# Altium PCB PCB_arranged.PcbDoc
Units mm, origin at the board's own origin, x right, y up, seen from the top; angles counter-clockwise.
Board outline 68.07 x 82.93 mm, 2 copper layers (Top Layer, Bottom Layer); 43 components, 27 nets, 114 pads, 16 vias.
Unrouted connection lines stored in the file: 2.
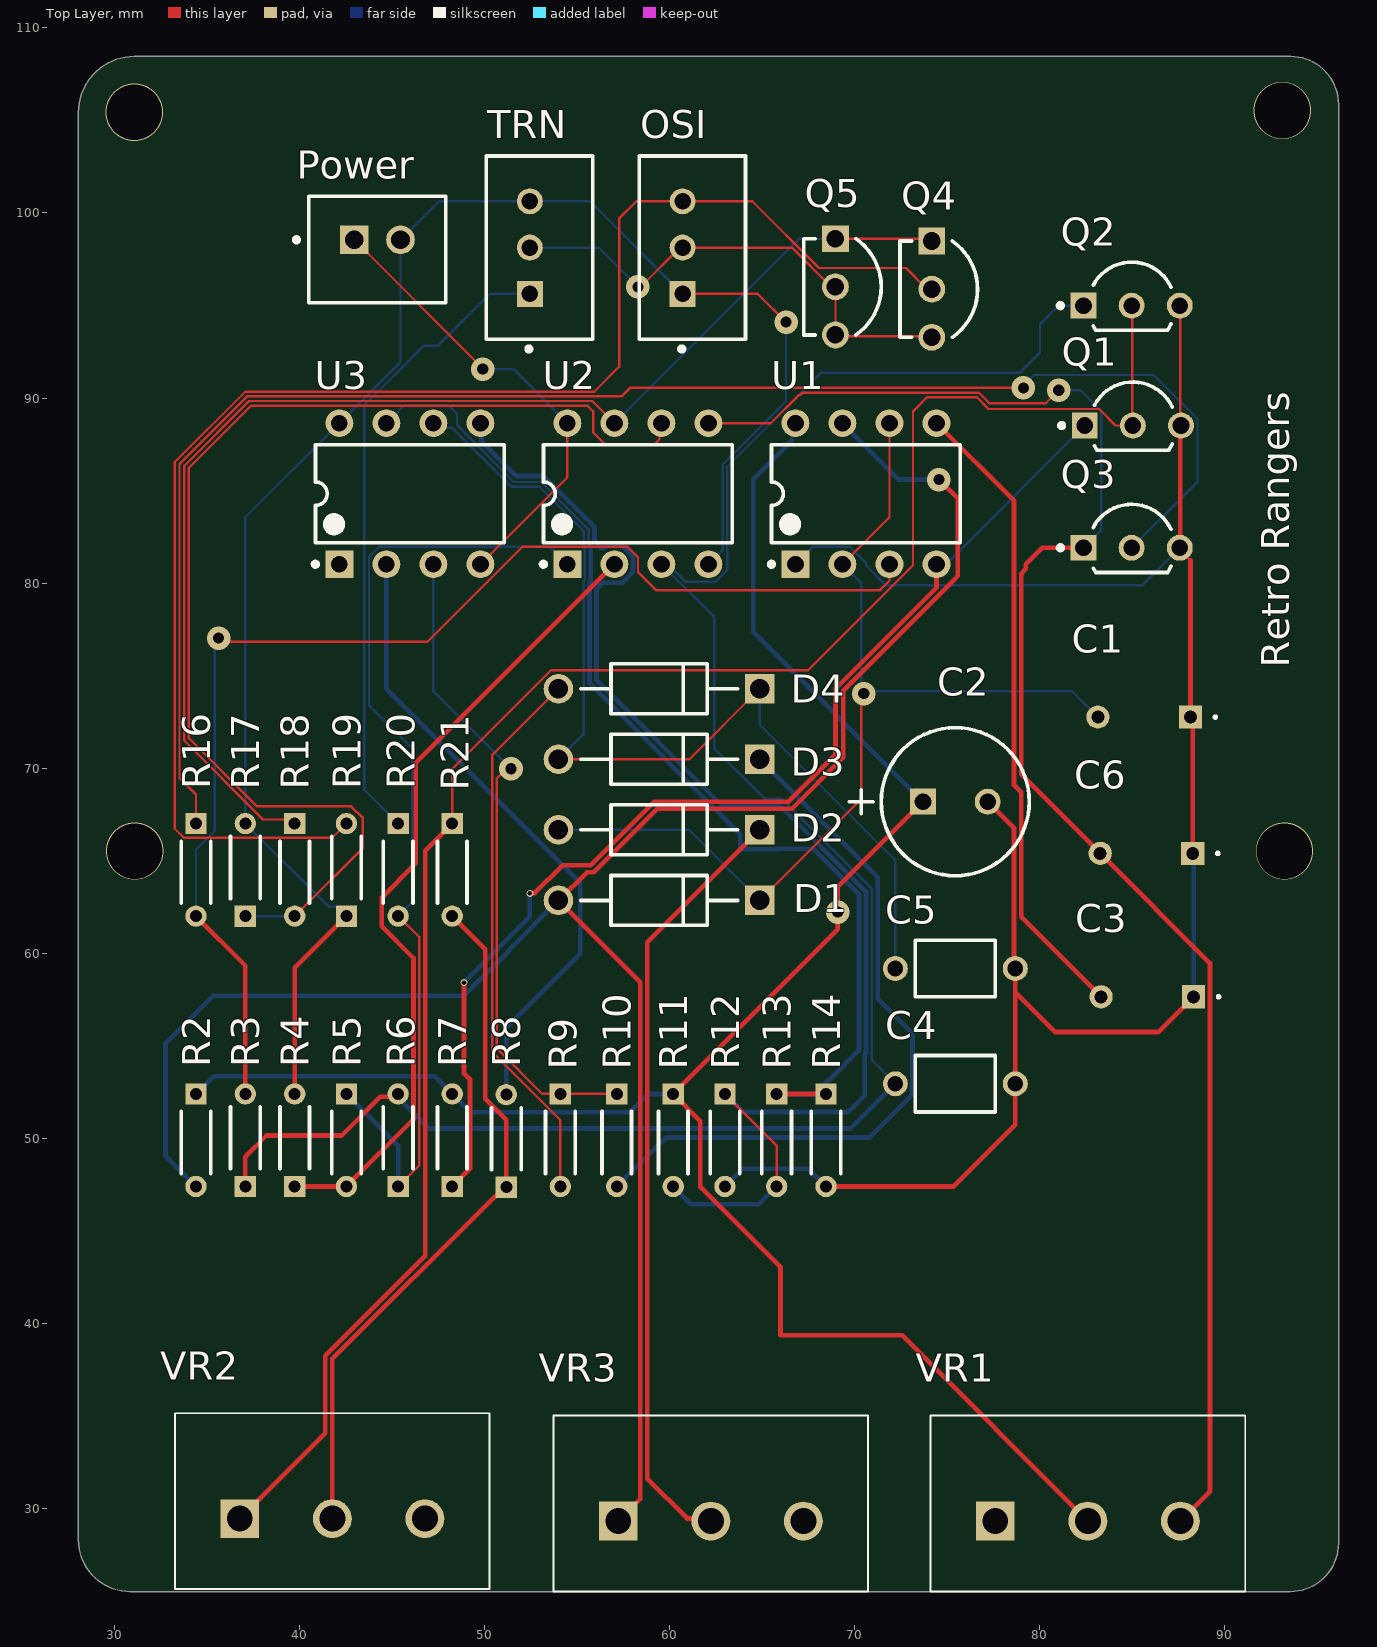
[diagram p0: Top Layer view]
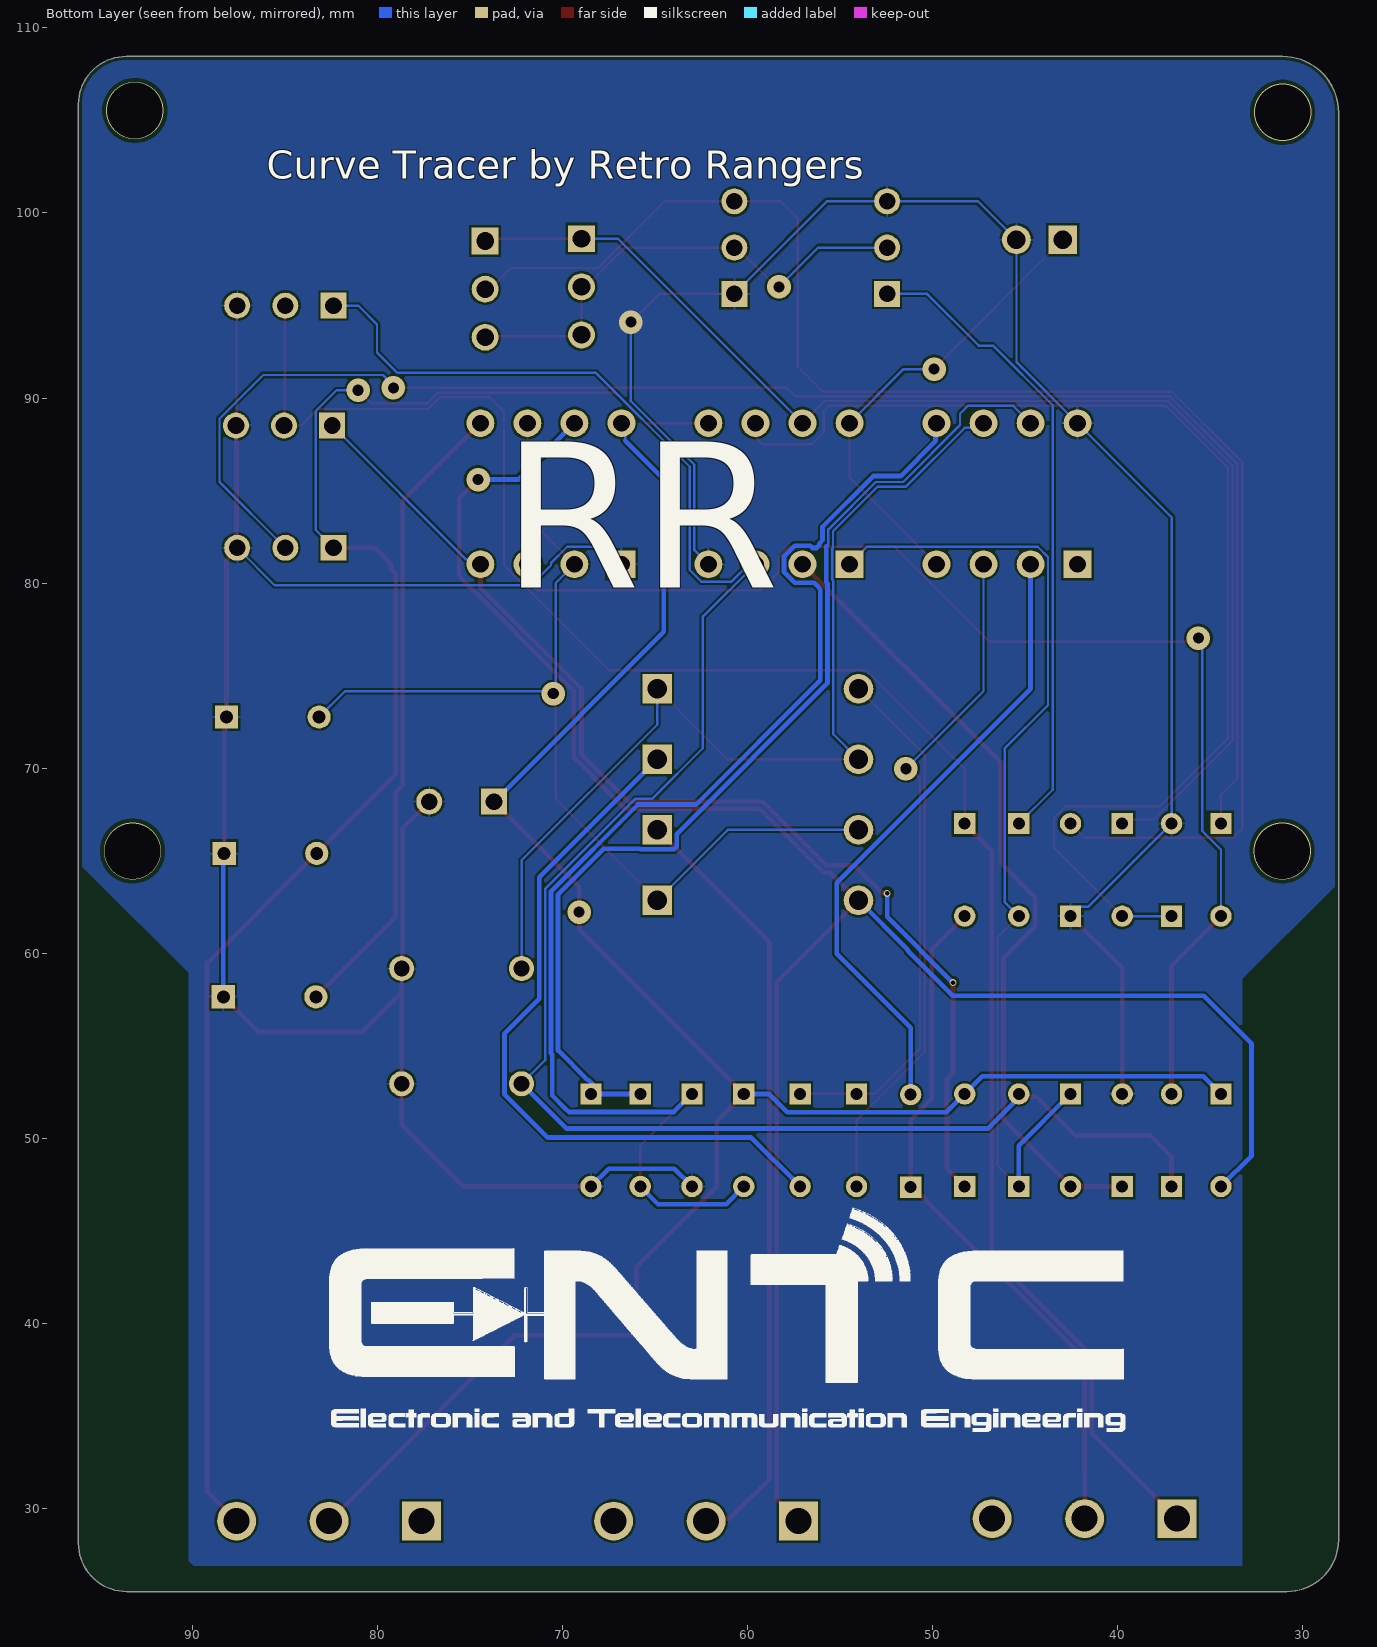
[diagram p1: Bottom Layer view, seen from below]

## Layer stack, top to bottom
Top Solder: solder mask 0.0102, Solder Resist, Dk 3.5
Top Layer: signal copper 0.0356
Dielectric 1: dielectric 0.32, FR-4, Dk 4.8
Bottom Layer: signal copper 0.0356
Bottom Solder: solder mask 0.0102, Solder Resist, Dk 3.5

## Board outline
28.067,28.314 ccw(c30.854,28.314) 30.854,25.527 93.537,25.527 ccw(c93.537,28.129) 96.139,28.129 96.139,71.12 96.139,105.871 ccw(c93.552,105.871) 93.552,108.458 31.089,108.458 ccw(c31.089,105.436) 28.067,105.436

## Design rules (kind name [scope] priority, off if disabled: settings)
BoardOutlineClearance [All] p1: gap=0.2 ignorepadtopadclearanceinfootprint=FALSE
Clearance [All] p1: gap=0.127 ignorepadtopadclearanceinfootprint=FALSE except(0.25: Arc-Hole Track-Hole SMDPad-Hole THPad-Hole Via-Hole Fill-Hole Poly-Hole Region-Hole Text-Hole)
ComponentClearance [All] p1: gap=0.127 collisioncheckmode=3 verticalgap=0.127 showdistances=TRUE
DiffPairsRouting [All] p1: maxlimit=0.254 minlimit=0.127 mostfreqgap=0.127 toplayer_minwidth=0.127 toplayer_maxwidth=25.4 toplayer_prefwidth=0.127 bottomlayer_minwidth=0.127 bottomlayer_maxwidth=25.4 bottomlayer_prefwidth=0.127 maxuncoupledlength=12.7
Height [All] p1: minheight=0 maxheight=1816.048 prefheight=12.7
HoleSize [All] p1: absolutevalues=TRUE maxlimit=6.3 minlimit=0.3 maxpercent=80.000 minpercent=20.000
HoleToHoleClearance [All] p1: gap=0.25 allowstackedmicrovias=FALSE
MinimumAnnularRing [All] p1: minimumring=0.076
MinimumSolderMaskSliver [All] p1: minsoldermaskwidth=0
PlaneClearance [All] p1: clearance=0.127
PlaneConnect PlaneConnectPowerPads [InPadClass('PowerPads')] p1: planeconnectstyle=Direct reliefexpansion=0.508 reliefentries=4 reliefconductorwidth=0.254 reliefairgap=0.254
PlaneConnect [All] p2: pad.planeconnectstyle=Relief pad.reliefexpansion=0.3 pad.reliefentries=4 pad.reliefconductorwidth=0.127 pad.reliefairgap=0.127 via.planeconnectstyle=Direct via.reliefexpansion=0.3 via.reliefentries=4 via.reliefconductorwidth=0.127 via.reliefairgap=0.127
PolygonConnect PolygonConnectPowerPads [All vs (InPadClass('PowerPads'))] p1: connectstyle=Direct reliefconductorwidth=0.254 reliefentries=4 polygonreliefangle="90 Angle" airgapwidth=0.254
PolygonConnect [All] p2: thpad.connectstyle=Relief thpad.reliefconductorwidth=0.127 thpad.reliefentries=4 thpad.polygonreliefangle="90 Angle" thpad.airgapwidth=0.127 smdpad.connectstyle=Relief smdpad.reliefconductorwidth=0.127 smdpad.reliefentries=4 smdpad.polygonreliefangle="90 Angle" smdpad.airgapwidth=0.127 via.connectstyle=Direct via.reliefconductorwidth=0.127 via.reliefentries=4 via.polygonreliefangle="90 Angle" via.airgapwidth=0.127
RoutingVias [All] p1: holewidth=0.3 width=0.6 viastyle="Through Hole" minholewidth=0.3 minwidth=0.6 maxholewidth=0.6 maxwidth=6.6
SilkToSilkClearance [All] p1: silktosilkclearance=0
SilkToSolderMaskClearance [IsPad] p1: minsilkscreentomaskgap=0.127 clearancetoexposedcopper=TRUE
SolderMaskExpansion [All] p1: expansion=0.075 istentingtop=FALSE
Width [All] p1: maxlimit=25.4 minlimit=0.127 preferedwidth=0.127 minimp=50.000000 maximp=50.000000 favimp=50.000000
20 further rules are at their usual default settings.

## Components (designator, comment, footprint, x,y, rotation, side; value= is the part's Value field where it differs from the comment)
C1 "FG24X7R1A106KRT00" FG24 88.138,72.771 r180 top
C2 "ECA-2AM470" CAPPR65-350-1150X800X1250 75.438,68.199 r0 top
C3 "FG24X7R1A106KRT00" FG24 88.312,57.658 r180 top
C4 "SA115C104KAR" AVX-SA115C104KAR 75.438,52.959 r0 top
C5 "SA115C104KAR" AVX-SA115C104KAR 75.438,59.182 r180 top
C6 "FG24X7R1A106KRT00" FG24 88.265,65.405 r180 top
D1 "1N4001-E3/54" FP-1N4001-E3-54-MFG 59.436,62.865 r180 top
D2 "1N4001-E3/54" FP-1N4001-E3-54-MFG 59.436,66.675 r180 top
D3 "1N4001-E3/54" FP-1N4001-E3-54-MFG 59.436,70.485 r180 top
D4 "1N4001-E3/54" FP-1N4001-E3-54-MFG 59.436,74.295 r180 top
OSI "to osilascope" FP-B3B-XH-A_LF_SN-MFG 61.231,98.131 r90 top
Power "B2B-XH-A(LF)(SN)" FP-B2B-XH-A_LF_SN-MFG 44.216,98.027 r0 top
Q1 "P2N2222ARL1G" ONSC-TO-92-3-29-11_AM_BL 85.03,88.519 r0 top
Q2 "P2N2222ARL1G" ONSC-TO-92-3-29-11_AM_BL 84.963,94.996 r0 top
Q3 "P2N2222ARL1G" ONSC-TO-92-3-29-11_AM_BL 84.963,81.915 r0 top
Q4 "2N3906TF" FP-135AR-MFG 74.549,95.885 r0 top
Q5 "2N3906TF" FP-135AR-MFG 69.342,96.012 r0 top
R2 "MRS16000C2002FCT00" FP-MRS1600-MFG 34.417,49.911 r270 top
R3 "MRS16000C2002FCT00" FP-MRS1600-MFG 37.084,49.911 r90 top
R4 "MRS16000C2002FCT00" FP-MRS1600-MFG 39.751,49.911 r90 top
R5 "MRS16000C2002FCT00" FP-MRS1600-MFG 42.545,49.911 r270 top
R6 "MRS16000C2002FCT00" FP-MRS1600-MFG 45.339,49.911 r90 top
R7 "MRS16000C2002FCT00" FP-MRS1600-MFG 48.26,49.911 r90 top
R8 "MRS16000C2002FCT00" FP-MRS1600-MFG 51.181,49.871 r90 top
R9 "MRS16000C2002FCT00" FP-MRS1600-MFG 54.102,49.911 r270 top
R10 "MRS16000C2002FCT00" FP-MRS1600-MFG 57.15,49.911 r270 top
R11 "MRS16000C2002FCT00" FP-MRS1600-MFG 60.198,49.911 r270 top
R12 "MRS16000C2002FCT00" FP-MRS1600-MFG 62.992,49.911 r270 top
R13 "MRS16000C2002FCT00" FP-MRS1600-MFG 65.786,49.911 r270 top
R14 "MRS16000C2002FCT00" FP-MRS1600-MFG 68.453,49.911 r270 top
R16 "MRS16000C2002FCT00" FP-MRS1600-MFG 34.417,64.516 r270 top
R17 "MRS16000C2002FCT00" FP-MRS1600-MFG 37.084,64.516 r90 top
R18 "MRS16000C2002FCT00" FP-MRS1600-MFG 39.751,64.516 r270 top
R19 "MRS16000C2002FCT00" FP-MRS1600-MFG 42.545,64.516 r90 top
R20 "MRS16000C2002FCT00" FP-MRS1600-MFG 45.339,64.516 r270 top
R21 "MRS16000C2002FCT00" FP-MRS1600-MFG 48.26,64.516 r270 top
TRN "B3B-XH-A(LF)(SN)" FP-B3B-XH-A_LF_SN-MFG 52.976,98.131 r90 top
U1 "NE555P" P0008A 70.612,84.836 r90 top
U2 "NE5532N" ONSC-PDIP-8-626-05 58.293,84.836 r90 top
U3 "TL072CP" P0008A 45.974,84.836 r90 top
VR1 "P160KN-0QC15B10K" P160KN0QC15B10K 77.597,29.337 r270 top
VR2 "P160KN-0QC15B10K" P160KN0QC15B10K 36.783,29.464 r270 top
VR3 "P160KN-0QC15B10K" P160KN0QC15B10K 57.23,29.337 r270 top

## Footprints (in the part's own frame and the unit in brackets; to place one, negate y for a bottom-side part, rotate by r counter-clockwise, add the part's x,y. Pads: shape width x height; smd on the part's side, far side on the other; paste and mask are expansions set on the pad)
AVX-SA115C104KAR [mm] "THD, 2-Leads, Dia 3.05mm, Body Length 4.32mm"
  round 1.35 hole 0.85: 1(-3.24,0) 2(3.24,0)
  silkscreen extent -2.16,-1.53 2.16,1.53, body extent -3.53,-1.52 3.53,1.52, height 3.05
CAPPR65-350-1150X800X1250 [mm] "THD, 2-Leads, Dia 8mm, Body 11.5mm"
  rect 1.4x1.4 hole 0.9: 1(-1.75,0)
  round 1.4 hole 0.9: 2(1.75,0)
  silkscreen extent -5.71,-4 4,4, body extent -4,-4 4,4, height 12.5
FG24 [mm]
  rect 1.25x1.25 hole 0.7: 1(0,0)
  round 1.25 hole 0.7: 2(5,0)
  silkscreen extent -1.4,-0.05 -1.3,0.05, body extent -0.28,-1.5 5.22,1.5, height 6.04
FP-1N4001-E3-54-MFG [mm]
  rect 1.6x1.6 hole 1.05 paste-1000 mask+0: 1(-5.438,0)
  round 1.6 hole 1.05 paste-1000 mask+0: 2(5.438,0)
  silkscreen extent -4.24,-1.35 4.24,1.35, body extent -6.34,-1.45 6.34,1.45, height 0.25
FP-135AR-MFG [mm]
  rect 1.45x1.45 hole 0.95 paste-1000 mask+0: 1(-0.38,2.6)
  round 1.45 hole 0.95 paste-1000 mask+0: 2(-0.38,0) 3(-0.38,-2.6)
  silkscreen extent -2.09,-2.6 2.09,2.6, body extent -2.19,-3.42 2.19,3.42, height 0.25
FP-B2B-XH-A_LF_SN-MFG [mm]
  rect 1.55x1.55 hole 1 paste-1000 mask+0: 1(-1.25,0.525)
  round 1.55 hole 1 paste-1000 mask+0: 2(1.25,0.525)
  silkscreen extent -4.5,-2.88 3.7,2.88, body extent -3.8,-2.98 3.8,2.98, height 0.25
FP-B3B-XH-A_LF_SN-MFG [mm]
  rect 1.4x1.4 hole 0.9 paste-1000 mask+0: 1(-2.5,0.525)
  round 1.4 hole 0.9 paste-1000 mask+0: 2(0,0.525) 3(2.5,0.525)
  silkscreen extent -5.6,-2.88 4.95,2.88, body extent -5.05,-2.98 5.05,2.98, height 0.25
FP-MRS1600-MFG [mm]
  rect 1.15x1.15 hole 0.65 paste-1000 mask+0: 1(-2.5,0)
  round 1.15 hole 0.65 paste-1000 mask+0: 2(2.5,0)
  silkscreen extent -1.55,-0.8 1.8,0.8, body extent -3.17,-0.9 3.17,0.9, height 0.25
ONSC-PDIP-8-626-05 [mm] "DIP, 8-Leads, Body 10.15x7.1mm, Pitch 2.54mm"
  rect 1.5x1.5 hole 0.9: 1(-3.81,3.81)
  round 1.5 hole 0.9: 2(-3.81,1.27) 3(-3.81,-1.27) 4(-3.81,-3.81) 5(3.81,-3.81) 6(3.81,-1.27) 7(3.81,1.27) 8(3.81,3.81)
  silkscreen extent -3.93,-5.1 2.65,5.23, body extent -3.95,-5.07 3.95,5.07, height 5.33
ONSC-TO-92-3-29-11_AM_BL [mm] "TO, 3-Leads, Body Dia 4.7mm, Pitch 2.6mm"
  rect 1.4x1.4 hole 0.9: 1(-2.6,0)
  round 1.4 hole 0.9: 2(0,0) 3(2.6,0)
  silkscreen extent -3.97,-1.34 2.13,2.35, body extent -2.84,-1.34 2.84,2.35, height 5.33
P0008A [mm] "DIP, 8-Leads, Body 10.15x6.6mm, Pitch 2.54mm"
  rect 1.5x1.5 hole 0.9: 1(-3.81,3.81)
  round 1.5 hole 0.9: 2(-3.81,1.27) 3(-3.81,-1.27) 4(-3.81,-3.81) 5(3.81,-3.81) 6(3.81,-1.27) 7(3.81,1.27) 8(3.81,3.81)
  silkscreen extent -3.93,-5.1 2.65,5.23, body extent -3.95,-5.07 3.95,5.07, height 5.08
P160KN0QC15B10K [mm]
  rect 2.1x2.1 hole 1.4: 1(0,0)
  round 2.1 hole 1.4: 2(0,5) 3(0,10)
  silkscreen extent -5.7,-3.5 3.8,13.5, body extent -5.7,-3.5 18.8,13.5, height 16.6

## Part data
C1 C3 C6: "Capacitor", Manufacturer_Name=TDK, Mouser Part Number=810-FG24X7R1A106KRT0, Arrow Part Number=FG24X7R1A106KRT00, Arrow Price/Stock=https://www.arrow.com/en/products/fg24x7r1a106krt00/tdk?region=nac, Datasheet Link=https://product.tdk.com/system/files/dam/doc/product/capacitor/ceramic/lead-mlcc/catalog/leadmlcc_halogenfree_fg_en.pdf, Height=5.5mm, Manufacturer_Part_Number=FG24X7R1A106KRT00, Mouser Price/Stock=https://www.mouser.co.uk/ProductDetail/TDK/FG24X7R1A106KRT00?qs=vNwBHymccZ8cUZDCmwcuOA%3D%3D
C2: library part CMP-1665-00041-1, "Aluminum Electrolytic Capacitor, 47 uF, +/- 20%, 100 V, -40 to 85 degC, 2-Pin THD, RoHS, Bulk", Case\Package=QFN, Max Operating Temperature="70 degC", Min Operating Temperature="-20 degC", Nominal Supply Voltage="3.3 V", Package Quantity=500, ComponentLink1Description="Manufacturer URL", ComponentLink1URL=http://www.panasonic.com/, ComponentLink2Description=Datasheet, ComponentLink2URL=http://industrial.panasonic.com/cdbs/www-data/pdf/RDF0000/ABA0000C1047.pdf, Data Rate="54 mbps", DatasheetVersion=Mar-16, Length="7.7 mm", Mount="Surface Mount", PackageDescription="2-Pin Radial Lead, Dia 8 mm, Body Length 11.5 mm", PackageReference=CAPPR65-350-1150X800X1250, Packaging="Tape and Reel", Pins=48, Radiation Hardening=No, RoHSCompliant=true
C4 C5: library part CMP-2000-07029-1, "Axial Leads / SpinGuard(R), Ceramic Capacitor, 0.10 uF +/- 10%, 50V, -55 to 125 degC, 2-Pin THD, RoHS, Tape and Reel", Capacitance=0.1µF, Manufacturer=AVX, Operating Temperature=-55°C~125°C, Package / Case=Axial, Package Description="2-Pin Axial Lead, Dia 3.05 mm, Body Length 4.32 mm", Ratings=-, Standard Package=1, Temperature Coefficient=X7R, Tolerance=±10%, Voltage - Rated=50V, Applications=GeneralPurpose, Catalog Drawings=SASeries_4.32x3.05, Category=Capacitors, Datasheet URL=https://datasheet.ciiva.com/27051/1074183-27051369.pdf, Datasheet Version=06/2007, Family=CeramicCapacitors, Features=-, Height - Seated (Max)=-, Lead Spacing=-, Lead Style=-, Manufacturer URL=http://www.avx.com/, Mounting Technology=ThroughHole, Mounting Type=ThroughHole, Online Catalog=SpinGuard®SASeries, Other Names=478-3151-1, Package Reference=SA115C104KAR, Packaging=-, Product Training Modules=ComponentSolutionsforSmartMeterApplications, Series=SpinGuard®SA, Size / Dimension="0.120\"Diax0.170\"L(3.05mmx4.32mm)", Thickness (Max)=-
D1 D2 D3 D4: library part CMP-02540-000077-1, "DIODE GEN PURP 50V 1A DO204AL", Average Rectified Current=1A, Capacitance=15pF, Case/Package=DO-204AL, Forward Voltage=1.1V, Max Forward Surge Current (Ifsm)=30A, Max Operating Temperature=150°C, Max Repetitive Reverse Voltage (Vrrm)=50V, Max Reverse Current=5uA, Min Operating Temperature=-50°C, Package Quantity=5500, Peak Non-Repetitive Surge Current=45A, Current=1A, Current Rating=1A, Diameter=2.7mm, Element Configuration=Single, Forward Current=1A, Height=2.7mm, Lead Free="Lead Free", Length=0.204inch, Max Reverse Voltage (DC)=50V, Max Surge Current=30A, Mount="Through Hole", Number of Pins=2, Output Current=1A, Packaging="Tape and Reel", Polarity=Standard, Radiation Hardening=No, Reverse Voltage=50V, RoHS Compliant=Yes, Series=-, Voltage=50V, Voltage Rating (DC)=50V, Width=2.7mm
OSI TRN: library part CMP-17439-000014-3, "CONN HEADER VERT 3POS 2.5MM", Color=Natural, Contact Resistance=20mR, Current Rating=3A, Flammability Rating="UL94 V-0", Housing Color=White, Insulation Resistance=1GR, Max Operating Temperature=85°C, Max Voltage Rating (AC)=250V, Min Operating Temperature=-25°C, Connector Type=Header, Contact Finish - Mating=TIN, Contact Material=Brass, Contact Plating=Tin, Contact Shape=Square, Contact Type="Male Pin", Depth=5.75mm, Fastening Type=Detent, Gender=Male, Housing Material=Polyamide, Insulation Color=Natural, Insulation Material=Nylon, Lead Free="Lead Free", Lead Pitch=2.5mm, Length=9.9mm, Max Current Rating=3A, Max Voltage Rating (DC)=250V, Mount="Through Hole", Number Of Contacts=3, Number of Positions=3, Number Of Rows=1, Orientation=Straight, Packaging=Bulk, Pitch=2.5mm, REACH SVHC="No SVHC", Series=XH, Termination=Solder, Voltage Rating=250V, Voltage Rating (AC)=250V, Wire/Cable Gauge=22AWG
Power: library part CMP-2000-05888-3, "CONN HEADER VERT 2POS 2.5MM", Color=Natural, Contact Resistance=20mR, Current Rating=3A, Housing Color=White, Insulation Resistance=1GR, Max Operating Temperature=85°C, Max Voltage Rating (AC)=250V, Min Operating Temperature=-25°C, Connector Type="Male Pin", Contact Material=Brass, Contact Plating=Tin, Contact Type="Male Pin", Depth=5.75mm, Fastening Type=Detent, Housing Material=Polyamide, Lead Free="Lead Free", Lead Pitch=2.5mm, Length=7.4mm, Max Current Rating=3A, Max Voltage Rating (DC)=250V, Mount="Through Hole", Number Of Contacts=2, Number of Positions=2, Number Of Rows=1, Orientation=Straight, Packaging=Bulk, Pitch=2.5mm, REACH SVHC="No SVHC", Series=XH, Termination=Solder, Voltage Rating=250V, Voltage Rating (AC)=250V, Wire/Cable Gauge=22AWG
Q1 Q2 Q3: library part CMP-1048-01587-1, "Amplifier Transistor, NPN Silicon, 3-Pin TO-92, Pb-Free, Tape and Reel", Manufacturer="On Semiconductor", ComponentLink1Description="Manufacturer URL", ComponentLink1URL=http://www.onsemi.com/, ComponentLink2Description=Datasheet, ComponentLink2URL=http://www.onsemi.com/pub_link/Collateral/P2N2222A-D.PDF, ComponentLink3Description="Package Specification", ComponentLink3URL=http://www.onsemi.com/pub_link/Collateral/MAC97-D.PDF, DatasheetVersion="Rev. 7", fT Min (MHz)=300, IC Continuous (A)=0.6, Mounting Technology="Through Hole", PackageDescription="3-Pin Transistor Outline, Body 4.825 x 3.685 mm, Pitch 1.27 mm", PackageReference=TO-92-3-29-11_AM_BL, PackageVersion="Rev. AM", Packing="Tape and Reel", PartNumber=P2N2222ARL1G, Polarity=NPN, RoHS=TRUE
Q4 Q5: library part CMP-00278-84408866-1, "2N3906TF Small Signal Bipolar Transistor, 0.2A I(C), 40V V(BR)CEO, 1-Element, PNP, Silicon, TO-92", Case/Package=TO-92, Collector Base Voltage (VCBO)=-40V, Collector Emitter Saturation Voltage=-400mV, Current Rating=-200mA, Emitter Base Voltage (VEBO)=-5V, Frequency=250MHz, Manufacturer Lifecycle Status=ACTIVE, Max Breakdown Voltage=160V, Max Junction Temperature (Tj)=150°C, Max Power Dissipation=625mW, Min Operating Temperature=-55°C, Collector Emitter Breakdown Voltage=-40V, Collector Emitter Voltage (VCEO)=-40V, Element Configuration=Single, Gain Bandwidth Product=250MHz, Height=5.33mm, hFE Min=100, Lead Free="Lead Free", Length=5.2mm, Lifecycle Status=Production, Max Collector Current=-200mA, Max Frequency=250MHz, Max Operating Temperature=150°C, Mount="Through Hole", NexarPartId=84408866, Number of Elements=1, Number of Pins=3, Packaging="Tape and Reel", Polarity=PNP, Power Dissipation=625mW, Radiation Hardening=No, REACH SVHC="No SVHC", RoHS=Compliant, Schedule B=8541210080, Transition Frequency=250MHz, Voltage Rating (DC)=-40V, Weight=240mg, Width=4.19mm
R2 R3 R4 R5 R6 R7 R8 R9 R10 R11 R12 R13 R14 R16 R17 R18 R19 R20 R21: library part CMP-02408-000019-1, "RES 20K OHM 0.4W 1% AXIAL", Case/Package=Conformal, Max Operating Temperature=155°C, Max Power Dissipation=400mW, Min Operating Temperature=-55°C, Resistance=20kR, Resistor Type="Metal Film", Temperature Coefficient=50ppm/°C, Tolerance=1%, Construction=Cylindrical, Contact Plating=Tin, Diameter=1.6mm, Length=3.6mm, Military Standard=Not, Mount="Through Hole", Number of Terminations=2, Packaging="Tape and Reel", Power Rating=400mW, Radiation Hardening=No, RoHS Compliant=Yes, Series=MRS16, Technology="THIN FILM", Termination=Axial
U1: library part CMP-2000-04954-1, "Precision Timer, 4.5 to 16 V, 0 to 70 degC, 8-Pin DIP, Pb-Free, Tube", Manufacturer=TexasInstruments, Maximum High Level Output Current=-200mA, Maximum Low Level Output Current=200mA, Operating Supply Voltage=5, Package=8PDIP, Package Description="8-Pin Double In-line Package, Body 9.59 x 6.35 mm, Pitch 2.54 mm", Package Reference=P8, Category=Timer, Datasheet URL=http://www.ti.com/general/docs/lit/getliterature.tsp?genericPartNumber=NE555&fileType=pdf, Datasheet Version="Rev. I, 09/2014", Manufacturer URL=http://www.ti.com/, Number of Internal Timers=1, Package URL=http://www.ti.com/lit/ml/mpdi001b/mpdi001b.pdf, Packaging=Rail/Tube, Rad Hard=No, Type=Standard
U2: library part CMP-1310-00070-1, "Internally Compensated Dual Low Noise Operational Amplifier, 6 to 40 V, 0 to 70 degC, 8-Pin PDIP, Tube", Manufacturer="On Semiconductor", ComponentLink1Description="Manufacturer URL", ComponentLink1URL=http://www.onsemi.com/, ComponentLink2Description=Datasheet, ComponentLink2URL=http://www.onsemi.cn/pub_link/Collateral/NE5532-D.PDF, ComponentLink3Description="Package Specification", ComponentLink3URL=http://www.onsemi.cn/pub_link/Collateral/626-05.PDF, DatasheetVersion="Rev. 2", GBW Typ (MHz)=10, Mounting Technology="Through Hole", PackageDescription="8-Pin Plastic Dual-In Line Package, Body 9.59 x 6.605 mm, Pitch 2.54 mm", PackageReference=PDIP-8-626-05, PackageVersion="Rev. N, 06/2013", Packing=Tube, PartNumber=NE5532N, RoHS=FALSE, SR Typ (V/uS)=9, VCC Max (V)=40, VCC Min (V)=6
U3: library part CMP-0017-00950-2, "Dual Low-Noise JFET-Input General-Purpose Operational Amplifier, 7 to 36 V, 0 to 70 degC, 8-pin DIP (P8), Pb-Free (RoHS)", Manufacturer="Texas Instruments", Rating=Catalog, Total Supply Voltage(Max)(+5V is 5, +/-5V is 10)=36, Total Supply Voltage(Min)(+5V is 5, +/-5V is 10)=7, CMRR(Min)(dB)=70, Code_JEDEC=MS-001, ComponentLink1Description="Manufacturer URL", ComponentLink1URL=http://www.ti.com/, ComponentLink2Description=Datasheet, ComponentLink2URL=http://www.ti.com/lit/ds/symlink/tl072.pdf, ComponentLink3Description="Package Specification", ComponentLink3URL=http://www.ti.com/litv/pdf/mpdi001b, DatasheetVersion=SLOS080J, Eco-Plan="Pb-Free (RoHS)", GBW(Typ)(MHz)=3, IIB(Max)(pA)=200, Iq per channel(Max)(mA)=2.5, Mounting Technology="Through Hole", Number of Channels=2, Offset Drift(Typ)(uV/C)=18, PackageDescription="8-Pin Plastic In-Line, Body 9.59 x 6.35 mm, Pitch 2.54 mm", PackageReference=P0008A, PackageVersion="4040082/E, 04/2010", PartNumber=TL072CP, Slew Rate(Typ)(V/us)=13, Sub Family="General Purpose Amplifier, High Supply Voltage Amplifier (>=30V)", Vio (25C)(Max)(mV)=10, Vn at 1kHz(Typ)(nV/rtHz)=18
VR1 VR2 VR3: "Variable Resistor", Manufacturer_Name="TT Electronics", Mouser Part Number=858-P160KN-0QC15B10K, Arrow Part Number=P160KN-0QC15B10K, Arrow Price/Stock=https://www.arrow.com/en/products/p160kn-0qc15b10k/bi-technologies, Datasheet Link=https://datasheet.datasheetarchive.com/originals/distributors/Datasheets-DGA21/91824.pdf, Height=16.5mm, Manufacturer_Part_Number=P160KN-0QC15B10K, Mouser Price/Stock=https://www.mouser.co.uk/ProductDetail/BI-Technologies-TT-Electronics/P160KN-0QC15B10K?qs=%252BUYXD5bnyXowj%252Bd8P32cNw%3D%3D

## Via types
v1: diameter 1.27, hole 0.6, Top Layer to Bottom Layer, 10 vias
v2: diameter 3.1, hole 3, Top Layer to Bottom Layer, 4 vias
v3: diameter 0.381, hole 0.254, Top Layer to Bottom Layer, 1 vias
v4: diameter 0.381, hole 0.254, Top Layer to Bottom Layer, tented top, 1 vias

## Nets (pads, with @x,y where several pads share a name; then routed paths per layer and width w, separated by ;. In a path a pad name is that pad's centre, name@x,y a point inside that pad or via, vN(x,y) a via of type N, cw(c..) or ccw(c..) an arc to the next point about the centre after c; other vN are vias at no path point)
GND: C1.1 C2.2 C3.1 C4.2 C5.1 C6.1 OSI.1 Power.2 Q1.3 Q2.3 Q3.3 R4.2 R12.2 R14.2 R17.2 R19.1 TRN.3 U1.1 U2.4 U3.8 | length 200.4
  Top Layer w0.127: OSI.1 64.77,95.631 v1(66.294,94.107) ; Q2.3 87.596,94.962 87.596,88.553 Q1.3 Q1.3@87.596,88.485 ; Q3.3@87.596,81.949 Q3.3 87.563,81.806 88.138,81.231 ; C1.1 C1.1@88.265,72.644
  Top Layer w0.254: R4.2 39.751,59.222 R19.1 ; R14.2 75.351,47.411 78.678,50.738 C4.2 78.678,57.912 ; C2.2 78.613,66.774 78.613,59.247 C5.1 78.678,57.912 ; Q3.3@87.596,81.949 Q1.3@87.596,88.485 ; C1.1 88.138,81.231 ; C6.1 C1.1@88.265,72.644 ; C3.1 86.407,55.753 80.837,55.753 78.678,57.912
  Bottom Layer w0.127: R19.1 42.033,62.528 41.573,62.528 R17.2 37.084,83.566 U3.8 45.466,91.948 Power.2 47.545,100.631 TRN.3 55.706,100.631 OSI.1 ; U2.4 62.865,81.788 62.865,86.398 66.294,89.827 v1(66.294,94.107) ; U1.1 67.743,81.967 69.732,81.967 70.612,81.086 70.612,80.966 71.695,79.883 85.531,79.883 Q3.3 ; C6.1 C6.1@88.312,65.358
  Bottom Layer w0.254: R12.2 63.948,48.367 67.497,48.367 R14.2 ; C3.1 C6.1@88.312,65.358
NetC1_2: C1.2 D1.1 D2.2 U1.2 U1.6 | length 55.4
  Top Layer w0.127: D1.1 70.358,68.349 70.358,73.905 v1(70.49,74.036) ; U1.2 71.882,83.566 U1.6
  Bottom Layer w0.127: D2.2 61.064,66.675 D1.1 ; U1.2 70.358,80.01 70.358,74.168 v1(70.49,74.036) ; v1@70.485,74.041 70.612,74.168 81.741,74.168 C1.2
NetC3_2: C3.2 U1.5 | length 34.7
  Top Layer w0.254: U1.5 78.613,84.455 78.613,69.088 78.994,68.707 78.994,61.976 C3.2
NetC4_1: C4.1 Q2.1 R3.1 R6.2 U2.3 | length 107.4
  Top Layer w0.254: R3.1 37.084,49.022 38.227,50.165 42.291,50.165 44.383,52.257 45.185,52.257 R6.2
  Bottom Layer w0.127: C4.1 70.929,54.227 70.929,63.477 66.042,68.364 65.126,68.364 62.41,71.08 62.41,78.221 62.368,78.221 U2.3 59.922,81.026 60.863,80.085 62.493,80.085 63.119,80.712 63.119,86.293 68.202,91.376 78.93,91.376 80.01,92.456 80.01,93.98 81.026,94.996 Q2.1
  Bottom Layer w0.254: R6.2 45.339,52.197 46.99,50.546 69.785,50.546 C4.1
NetC5_2: C5.2 D3.2 D4.1 U3.6 | length 54.1
  Top Layer w0.127: D3.2 61.064,70.485 D4.1
  Bottom Layer w0.127: U3.6 47.498,88.392 48.26,88.392 51.435,85.217 52.959,85.217 55.372,82.804 55.372,81.906 55.424,81.855 55.424,80.197 55.36,80.134 55.36,71.847 D3.2 ; D4.1 64.874,72.354 72.198,65.03 C5.2
NetC6_2: C6.2 Q3.1 U2.5 VR1.3 | length 90.8
  Top Layer w0.127: U2.5 65.472,88.646 66.996,90.17 67.056,90.17 67.183,90.297 76.708,90.297 77.279,89.725 80.328,89.725 v1(81.026,90.424)
  Top Layer w0.254: Q3.1 80.137,81.915 79.248,81.026 79.248,80.772 78.994,80.518 78.994,69.676 C6.2 89.191,59.479 89.191,30.931 VR1.3
  Bottom Layer w0.127: v1(81.026,90.424) 82.194,90.424 83.321,89.298 83.321,82.873 Q3.1
NetD1_2: D1.2 R2.2 U1.7 VR3.1 | length 111.8
  Top Layer w0.254: VR3.1 58.42,30.527 58.42,58.443 D1.2 54.021,62.865 55.545,64.389 55.911,64.389 59.34,67.818 66.616,67.818 69.387,70.589 69.387,74.184 69.581,74.385 69.585,74.389 75.374,80.178 75.374,80.2 75.565,80.391 75.565,84.582 v1(74.549,85.598)
  Bottom Layer w0.254: R2.2 32.766,49.062 32.766,55.118 35.355,57.707 48.895,57.707 51.331,60.143 51.331,60.198 D1.2 ; U1.7 72.39,85.598 v1(74.549,85.598)
NetD2_1: D2.1 VR3.2 | length 41.9
  Top Layer w0.254: VR3.2 62.091,29.476 60.948,29.476 58.801,31.623 58.801,60.602 D2.1
NetD3_1: D3.1 R10.2 | length 39.6
  Bottom Layer w0.254: R10.2 59.791,50.052 70.784,50.052 73.127,52.395 73.127,55.669 71.247,57.549 71.247,64.112 D3.1
NetD4_2: D4.2 R9.2 | length 29.9
  Top Layer w0.127: D4.2 50.419,70.716 50.419,54.675 54.102,50.992 R9.2
NetOSI_2: OSI.2 Q4.3 Q5.2 Q5.3 TRN.2 | length 27
  Top Layer w0.127: v1(58.293,96.012) 58.44,96.012 60.559,98.131 66.61,98.131 68.729,96.012 Q5.2 Q5.3 69.026,93.349 74.106,93.349 Q4.3
  Bottom Layer w0.127: TRN.2 56.174,98.131 v1(58.293,96.012)
NetOSI_3: OSI.3 Q4.2 R19.2 | length 83
  Top Layer w0.127: R19.2 41.779,66.25 33.763,66.25 33.274,66.74 33.274,86.549 37.074,90.349 55.932,90.349 57.277,91.694 57.277,99.695 58.213,100.631 OSI.3 64.469,100.631 68.072,97.028 72.771,97.028 73.914,95.885 Q4.2
NetQ1_1: Q1.1 R7.1 U1.4 | length 61.1
  Top Layer w0.254: R7.1 49.216,48.367 49.216,53.216 48.895,53.537 v3(48.895,58.42) ; v4(52.451,63.246) 52.474,63.269 52.728,63.269 54.229,64.77 55.753,64.77 59.182,68.199 66.421,68.199 68.961,70.739 68.961,74.19 68.961,74.295 69.238,74.582 74.422,79.766 U1.4
  Bottom Layer w0.127: U1.4 74.685,81.289 75.2,81.289 Q1.1
  Bottom Layer w0.254: v3(48.895,58.42) 52.451,61.976 v4(52.451,63.246)
NetQ1_2: Q1.2 Q2.2 R21.1 VR2.1 | length 102.3
  Top Layer w0.127: R21.1 48.26,69.958 53.599,75.297 67.483,75.297 73.152,80.966 73.152,89.281 73.914,90.043 76.603,90.043 77.236,89.41 83.209,89.41 84.099,88.519 Q1.2 84.997,88.553 84.997,94.962 Q2.2
  Top Layer w0.254: VR2.1 41.404,34.085 41.404,38.26 46.803,43.659 46.803,65.559 R21.1
NetQ3_2: Q3.2 R16.1 | length 86.3
  Top Layer w0.127: R16.1 34.417,68.58 33.528,69.469 33.528,86.443 37.179,90.095 57.404,90.095 57.86,90.551 v1(79.121,90.551)
  Bottom Layer w0.127: v1(79.121,90.551) 79.121,90.691 79.68,91.249 86.159,91.249 88.521,88.888 88.521,85.473 Q3.2
NetQ4_1: Q4.1 Q5.1 R18.1 U2.7 | length 69.2
  Top Layer w0.127: R18.1 39.528,67.239 38.044,67.239 33.782,71.501 33.782,86.338 37.284,89.841 55.828,89.841 U2.7 ; Q5.1 74.042,98.612 Q4.1
  Bottom Layer w0.127: U2.7 66.989,98.612 Q5.1
NetR3_2: R3.2 R16.2 U1.3 | length 67.2
  Top Layer w0.127: v1(35.636,77.038) 35.838,76.835 46.923,76.835 52.055,81.967 57.733,81.967 58.293,81.407 58.293,80.607 59.271,79.629 71.374,79.629 71.882,80.137 U1.3
  Top Layer w0.254: R16.2 37.084,59.349 R3.2
  Bottom Layer w0.127: R16.2 34.417,65.597 35.433,66.613 35.433,76.835 v1(35.636,77.038)
NetR4_1: R4.1 R5.2 U2.2 | length 43.8
  Top Layer w0.254: R4.1 R5.2 46.168,51.034 46.168,59.75 44.45,61.468 44.45,63.02 46.295,64.865 46.295,70.298 U2.2
NetR5_1: R5.1 R6.1 R20.2 U2.1 | length 53.7
  Top Layer w0.127: R6.1 46.486,48.558 46.486,60.869 R20.2
  Bottom Layer w0.127: R20.2 46.105,62.782 46.105,71.066 43.763,73.407 43.763,81.416 44.314,81.967 53.542,81.967 U2.1
  Bottom Layer w0.254: R5.1 45.339,49.617 R6.1
NetR8_1: R8.1 R21.2 VR2.2 | length 37.7
  Top Layer w0.254: VR2.2 41.783,32.004 41.785,32.006 41.785,38.102 50.546,46.863 50.584,46.863 50.644,46.923 50.733,46.923 R8.1 51.181,51.019 50.038,52.162 50.038,60.238 R21.2
NetR8_2: R8.2 U3.1 U3.2 | length 34.6
  Bottom Layer w0.254: U3.2 44.704,74.299 55.179,63.824 55.179,59.983 51.181,55.985 R8.2
NetR9_1: R9.1 R10.1 U3.3 | length 35.9
  Top Layer w0.127: v1(51.435,69.977) 51.181,69.977 50.673,69.469 50.673,54.864 53.126,52.411 R9.1 R10.1
  Bottom Layer w0.127: U3.3 47.244,74.168 v1(51.435,69.977)
NetR11_2: R11.2 R12.1 R13.2 U3.5 | length 71.7
  Top Layer w0.127: R12.1 65.786,49.617 R13.2
  Bottom Layer w0.254: U3.5 49.84,88.59 49.84,87.664 51.715,85.788 53.196,85.788 55.944,83.041 55.944,82.323 56.122,82.144 56.122,82.053 56.271,81.904 56.481,81.904 56.607,82.03 57.439,82.03 58.027,81.442 58.027,80.61 57.439,80.022 56.385,80.022 56.236,79.873 56.236,79.858 56.059,79.681 56.059,74.751 62.763,68.047 65.911,68.047 70.612,63.345 70.612,54.601 70.549,54.537 70.549,52.325 69.869,51.645 69.659,51.435 68.311,51.435 63.968,51.435 R12.1 ; R11.2 61.154,46.455 64.83,46.455 R13.2
NetR13_1: R13.1 R14.1 U3.7 | length 59.1
  Top Layer w0.254: R13.1 R14.1
  Bottom Layer w0.127: U3.7 45.645,89.587 48.081,89.587 48.514,89.154 48.514,88.541 51.584,85.471 53.064,85.471 55.626,82.909 55.626,82.079 55.7,82.005 55.722,82.005 ; R14.1@67.941,52.411 68.453,52.923 R14.1@68.35,52.923
  Bottom Layer w0.254: 55.722,82.005 55.741,81.986 55.741,80.066 55.678,80.002 55.678,74.594 63.82,66.451 63.82,65.77 63.969,65.621 65.779,65.621 65.817,65.659 67.759,65.659 70.231,63.187 70.231,54.759 68.685,53.213 ; R13.1 R14.1@67.941,52.411 ; R14.1@68.35,52.923 68.577,53.149
NetR17_1: R17.1 R18.2 U2.6 | length 64.6
  Top Layer w0.127: R18.2 43.434,65.699 43.434,67.31 42.799,67.945 37.719,67.945 34.036,71.628 34.036,86.233 37.39,89.587 55.574,89.587 55.88,89.281 55.88,88.138 56.515,87.503 59.182,87.503 59.459,87.78 59.459,88.542 U2.6
  Bottom Layer w0.127: R17.1 R18.2
NetR20_1: R20.1 TRN.1 | length 34.8
  Bottom Layer w0.127: R20.1 43.509,68.846 43.509,89.61 46.736,92.837 47.498,92.837 50.292,95.631 TRN.1
VCC: C2.1 Power.1 R2.1 R7.2 R11.1 U1.8 U2.8 U3.4 VR1.2 | length 135.5
  Top Layer w0.127: Power.1 49.911,91.607 v1(49.911,91.567) ; U3.4 54.483,85.725 U2.8
  Top Layer w0.254: R7.2 R7.2@48.26,52.578 ; C2.1 69.088,63.599 v1(69.088,62.23) 69.088,61.301 R11.1 61.662,50.947 61.662,47.389 65.998,43.053 65.998,39.37 72.564,39.37 VR1.2
  Bottom Layer w0.127: v1(49.911,91.567) 51.562,91.567 U2.8 ; 66.602,87.705 66.602,88.446 U1.8
  Bottom Layer w0.254: R2.1 35.373,53.367 47.304,53.367 R7.2 49.256,51.415 57.843,51.415 58.839,52.411 R11.1 ; 66.602,87.705 64.516,85.62 64.516,77.371 C2.1
pads on no net: VR1.1 VR2.3 VR3.3
copper on no net:
  other v2: 31.115,65.532 93.218,65.532 31.089,105.436 93.091,105.537

## Polygon pours and split planes (outlines as drawn)
GND on Bottom Layer "GND_L02_P005" (solid, pour order 5): 23.304,66.04 25.846,66.04 33.37,58.516 89.758,58.516 98.308,67.066 98.335,70.357 99.632,109.982 23.304,109.982
GND on Bottom Layer "GND_L02_P001" (solid, pour order 1): 33.274,58.801 90.17,59.309 90.17,27.178 89.916,26.924 33.274,26.924

## Silkscreen, mask and mechanical layers (free items; w line width, h text height)
Top Overlay:
  text "Retro Rangers" at 93.472,75.438 h1.52 r90
Bottom Overlay:
  drawing of 53 lines, arcs and shapes, not listed
  text "Curve Tracer by Retro Rangers" at 85.979,101.854 h1.52
  text "RR" at 73.279,74.93 h25.4
Mechanical 1:
  lines w0.254: 28.067,28.314 ccw(c30.854,28.314) 30.854,25.527 93.537,25.527 ccw(c93.537,28.129) 96.139,28.129 96.139,30.861 96.139,40.894 96.139,48.26 96.139,57.15 96.139,64.135 96.139,71.12 96.139,105.871 ccw(c93.552,105.871) 93.552,108.458 31.089,108.458 ccw(c31.089,105.436) 28.067,105.436 28.067,28.314